# Altium PCB PCB1_BioTron.PcbDoc
Units mm, origin at the board's own origin, x right, y up, seen from the top; angles counter-clockwise.
Board outline 35.56 x 47.37 mm, 18 copper layers (F.Cu, F.Mask, B.Cu, B.Mask, F.SilkS, B.SilkS, F.Adhes, B.Adhes, F.Paste, B.Paste, Dwgs.User, Cmts.User, Eco1.User, Eco2.User, Edge.Cuts, Margin, B.CrtYd, F.CrtYd); 19 components, 26 nets, 65 pads, 15 vias.
Unrouted connection lines stored in the file: 11.
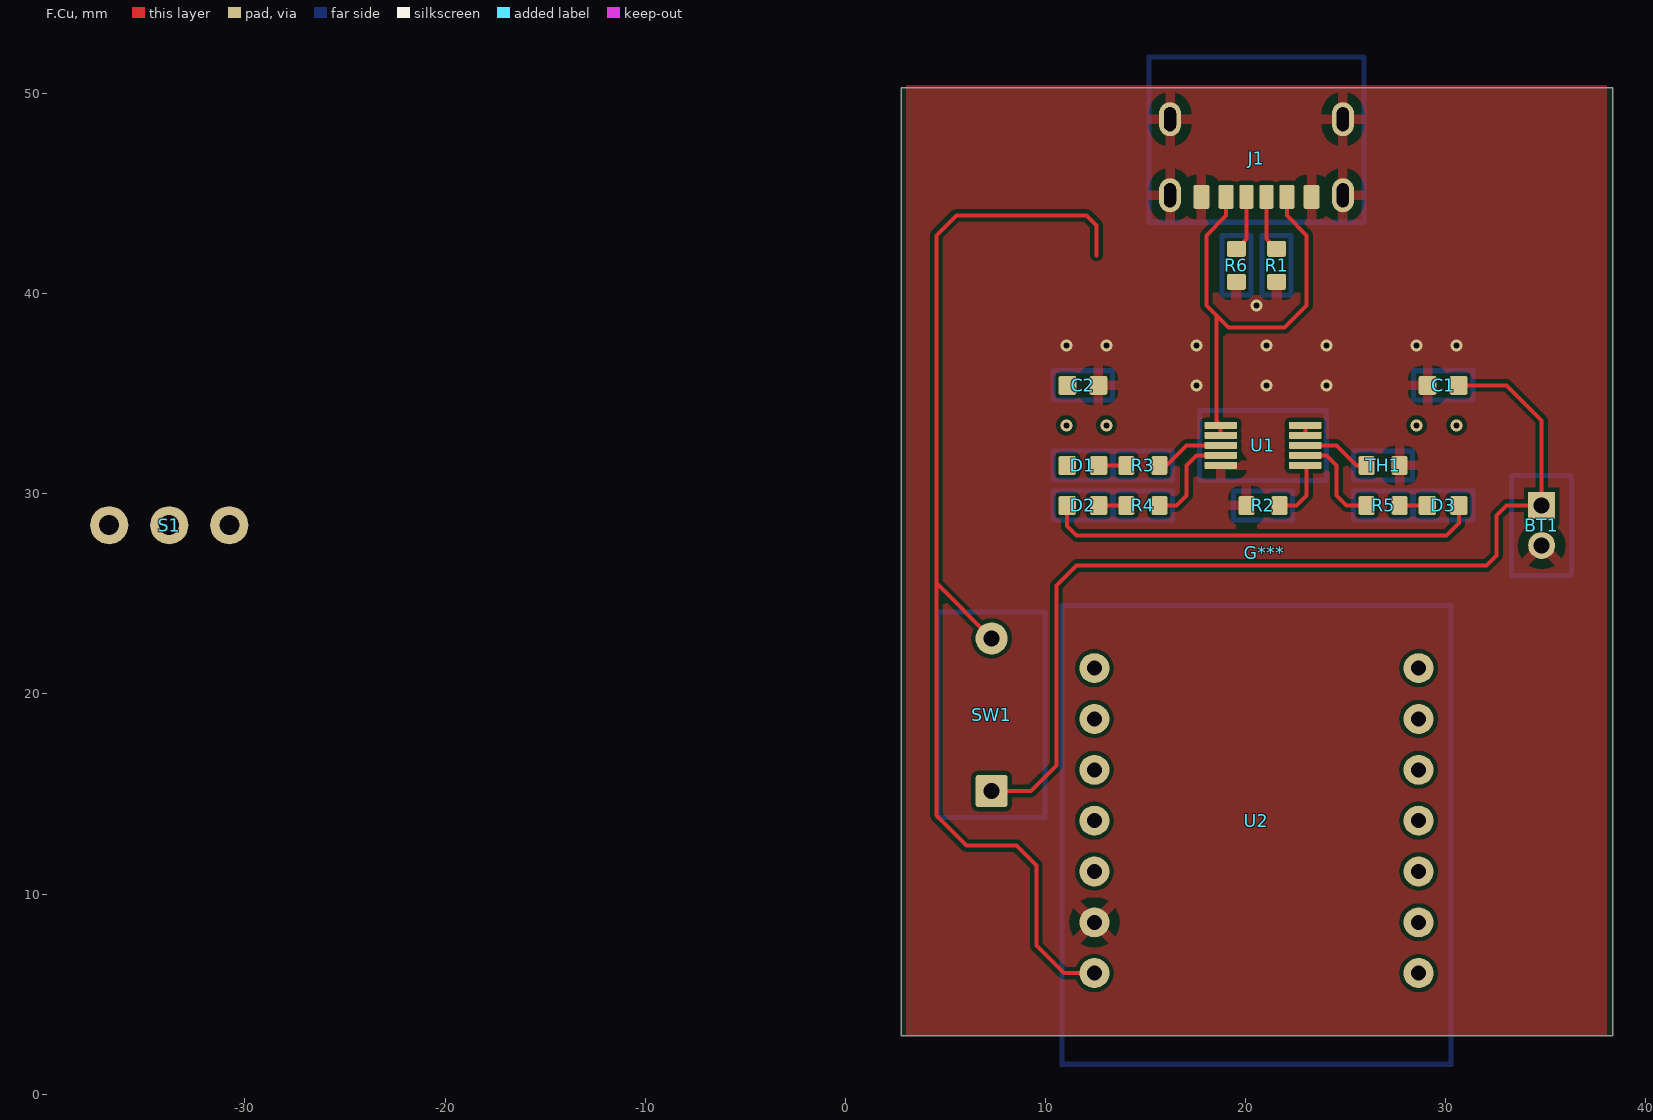
[diagram p0: F.Cu view]
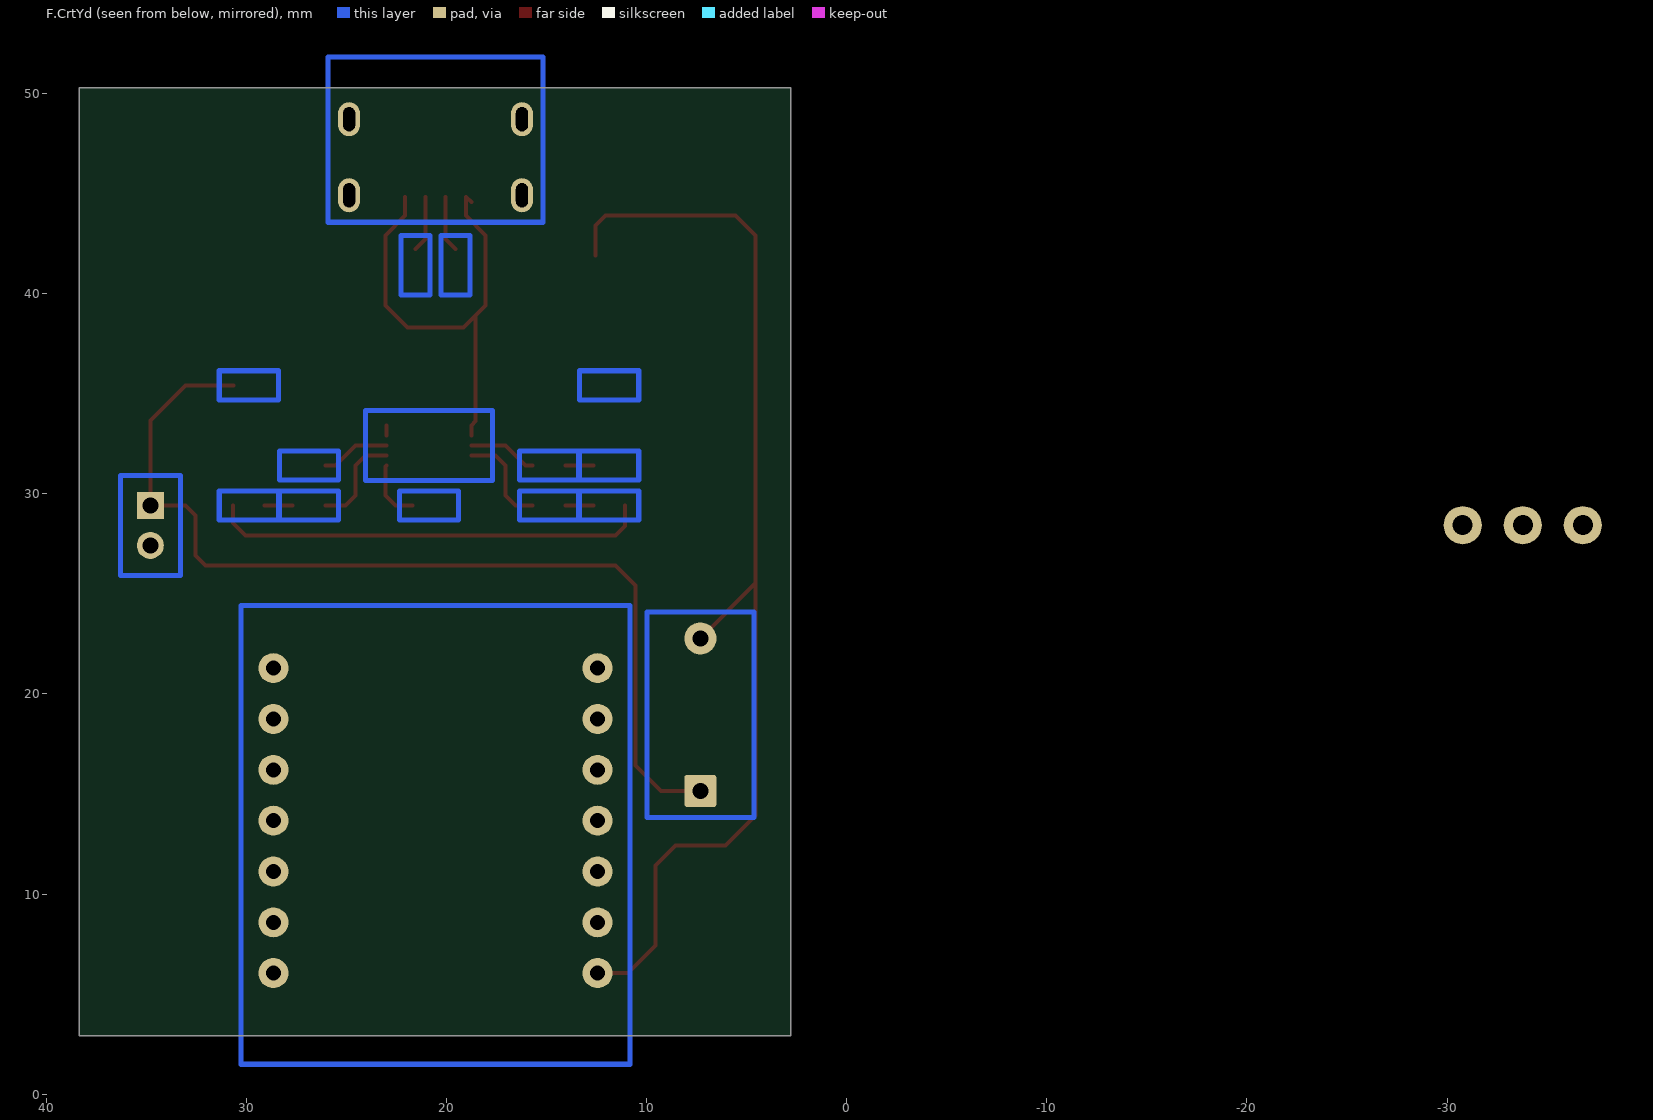
[diagram p1: F.CrtYd view, seen from below]
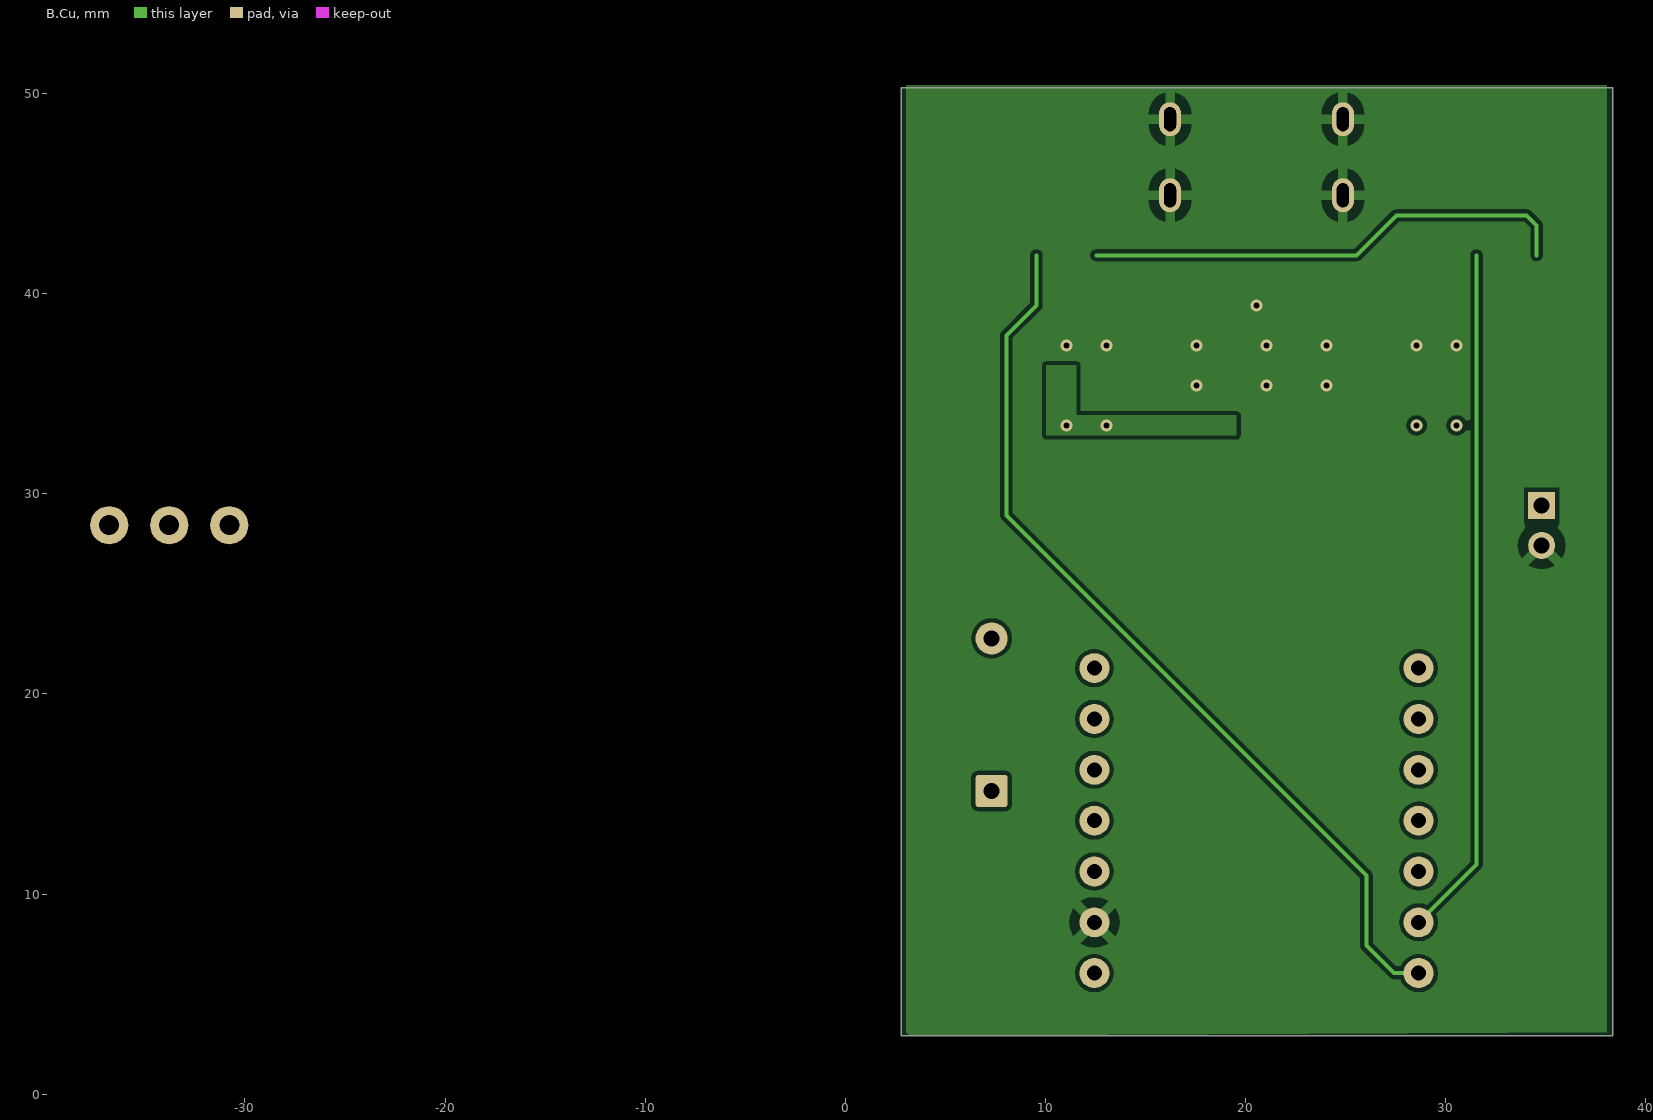
[diagram p2: B.Cu]
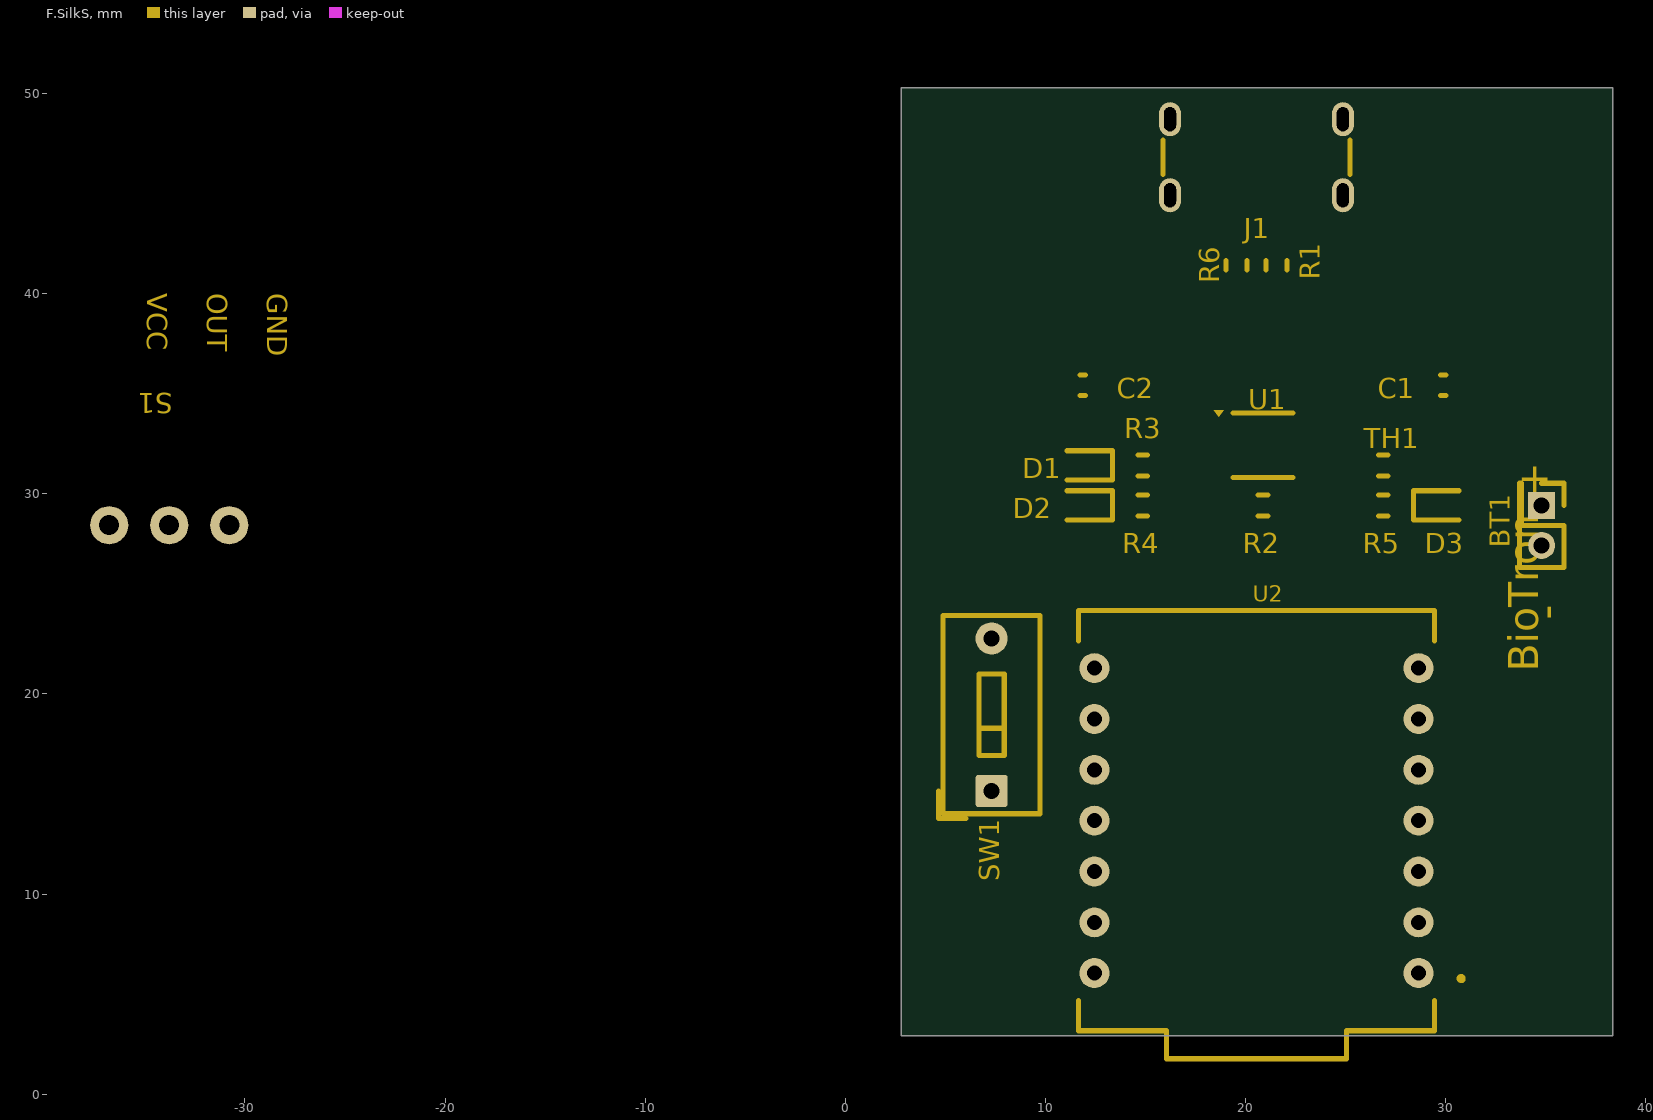
[diagram p3: F.SilkS]
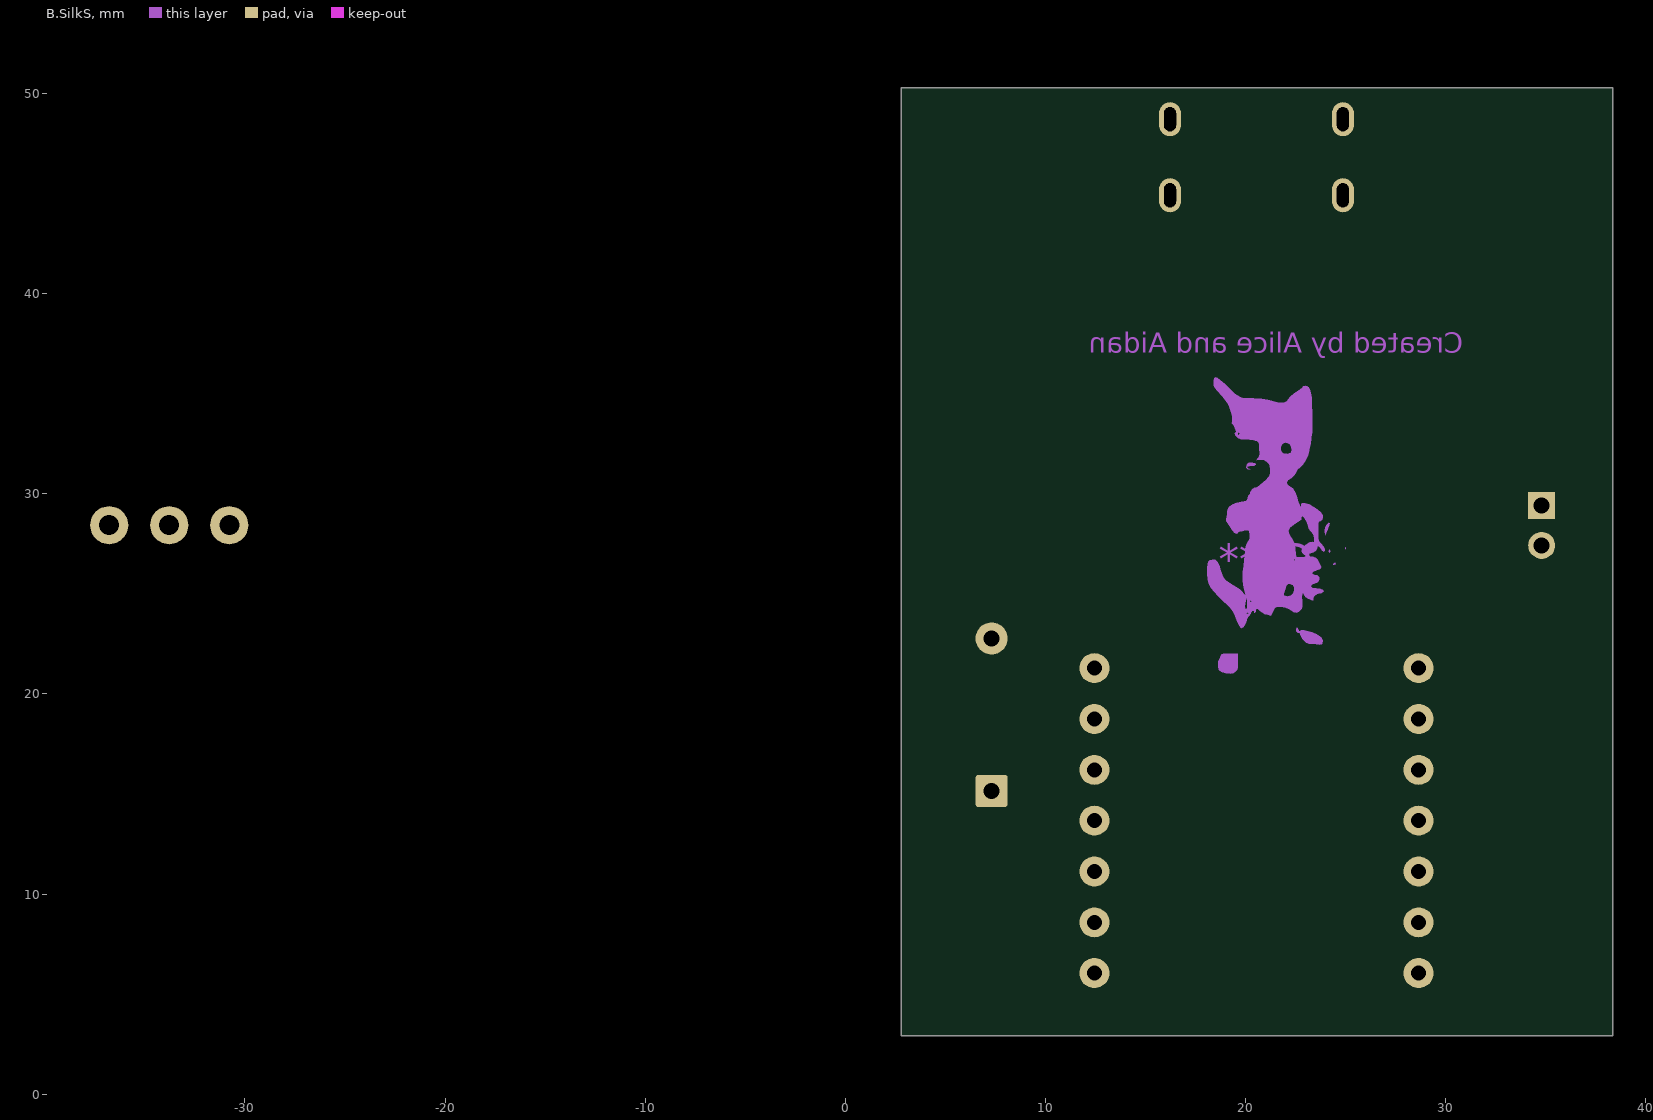
[diagram p4: B.SilkS]
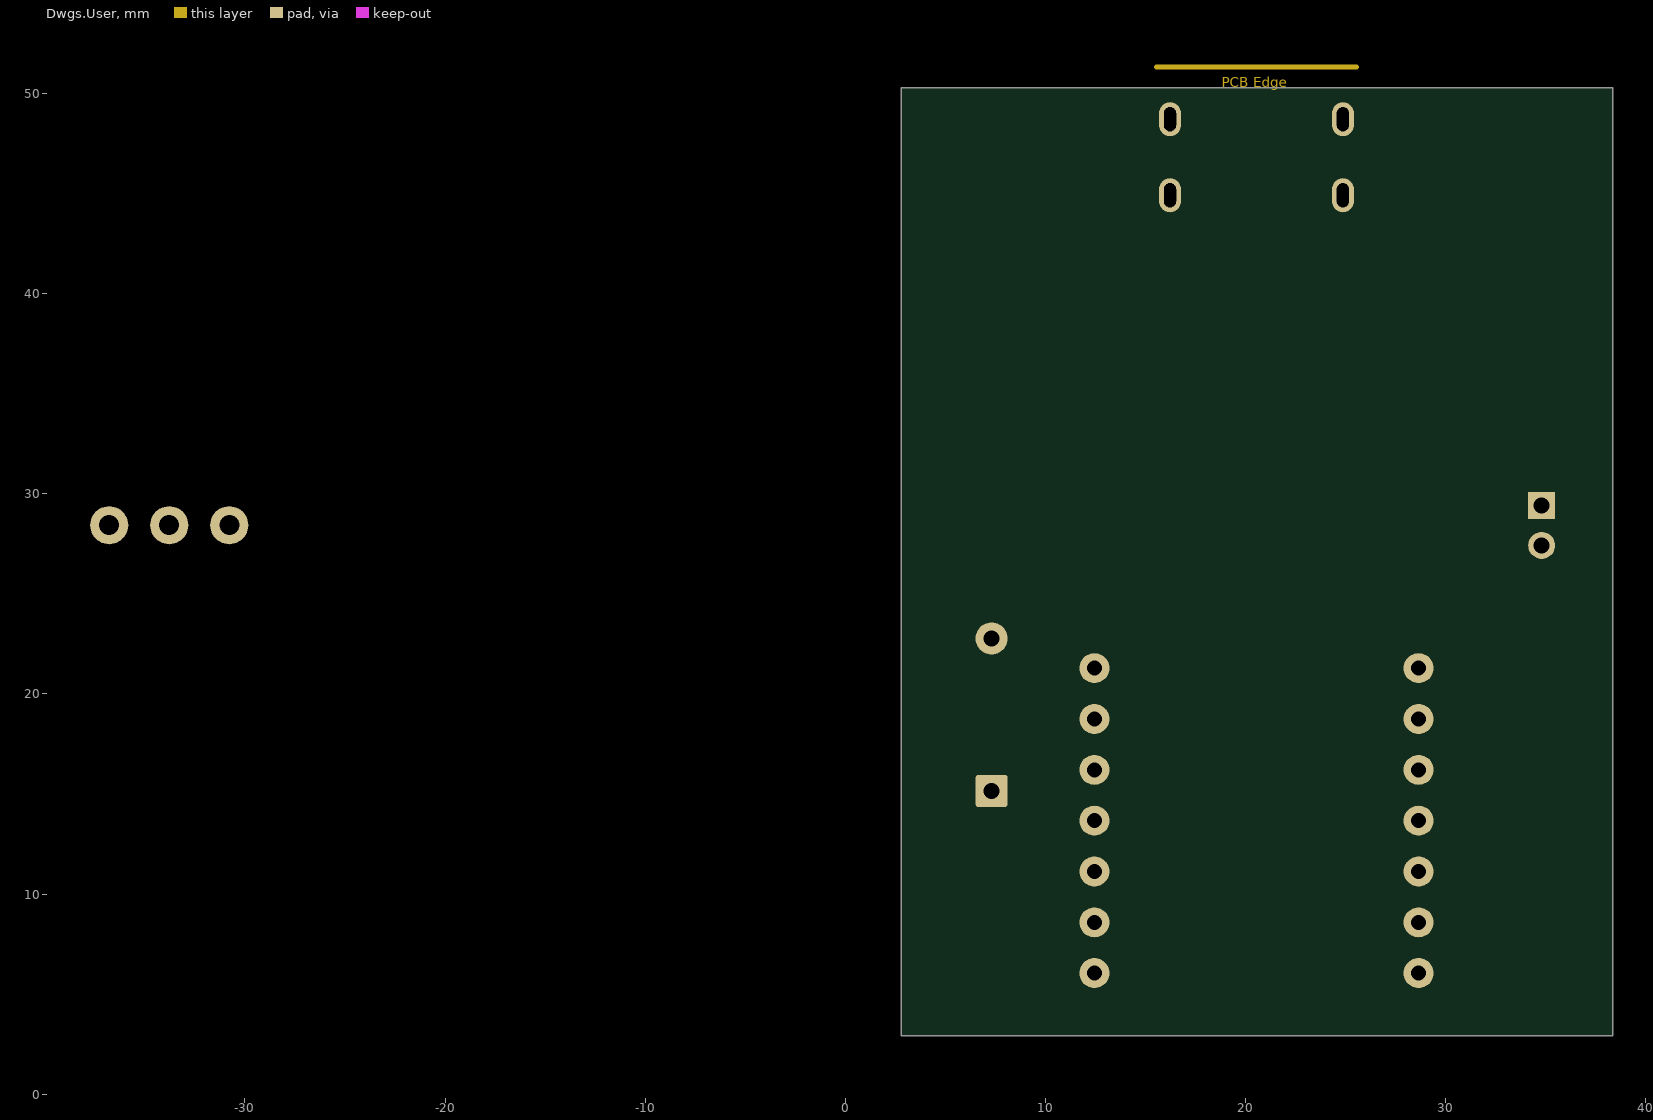
[diagram p5: Dwgs.User]
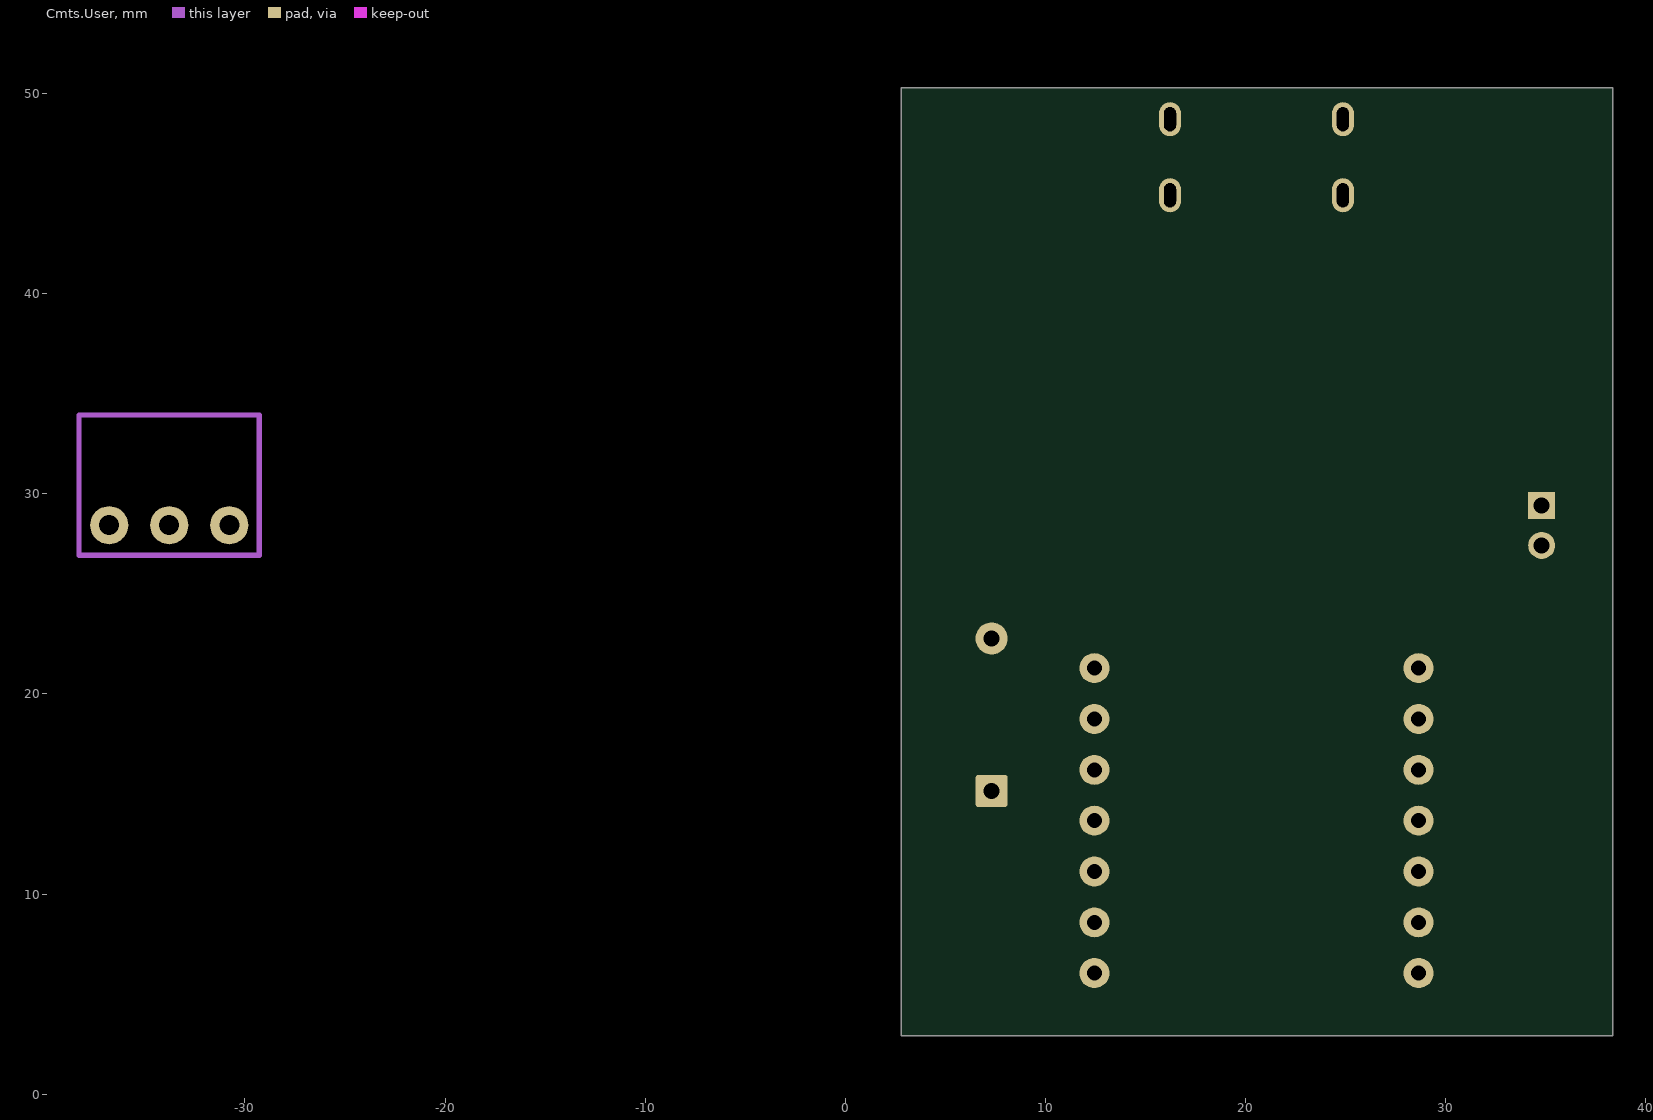
[diagram p6: Cmts.User]
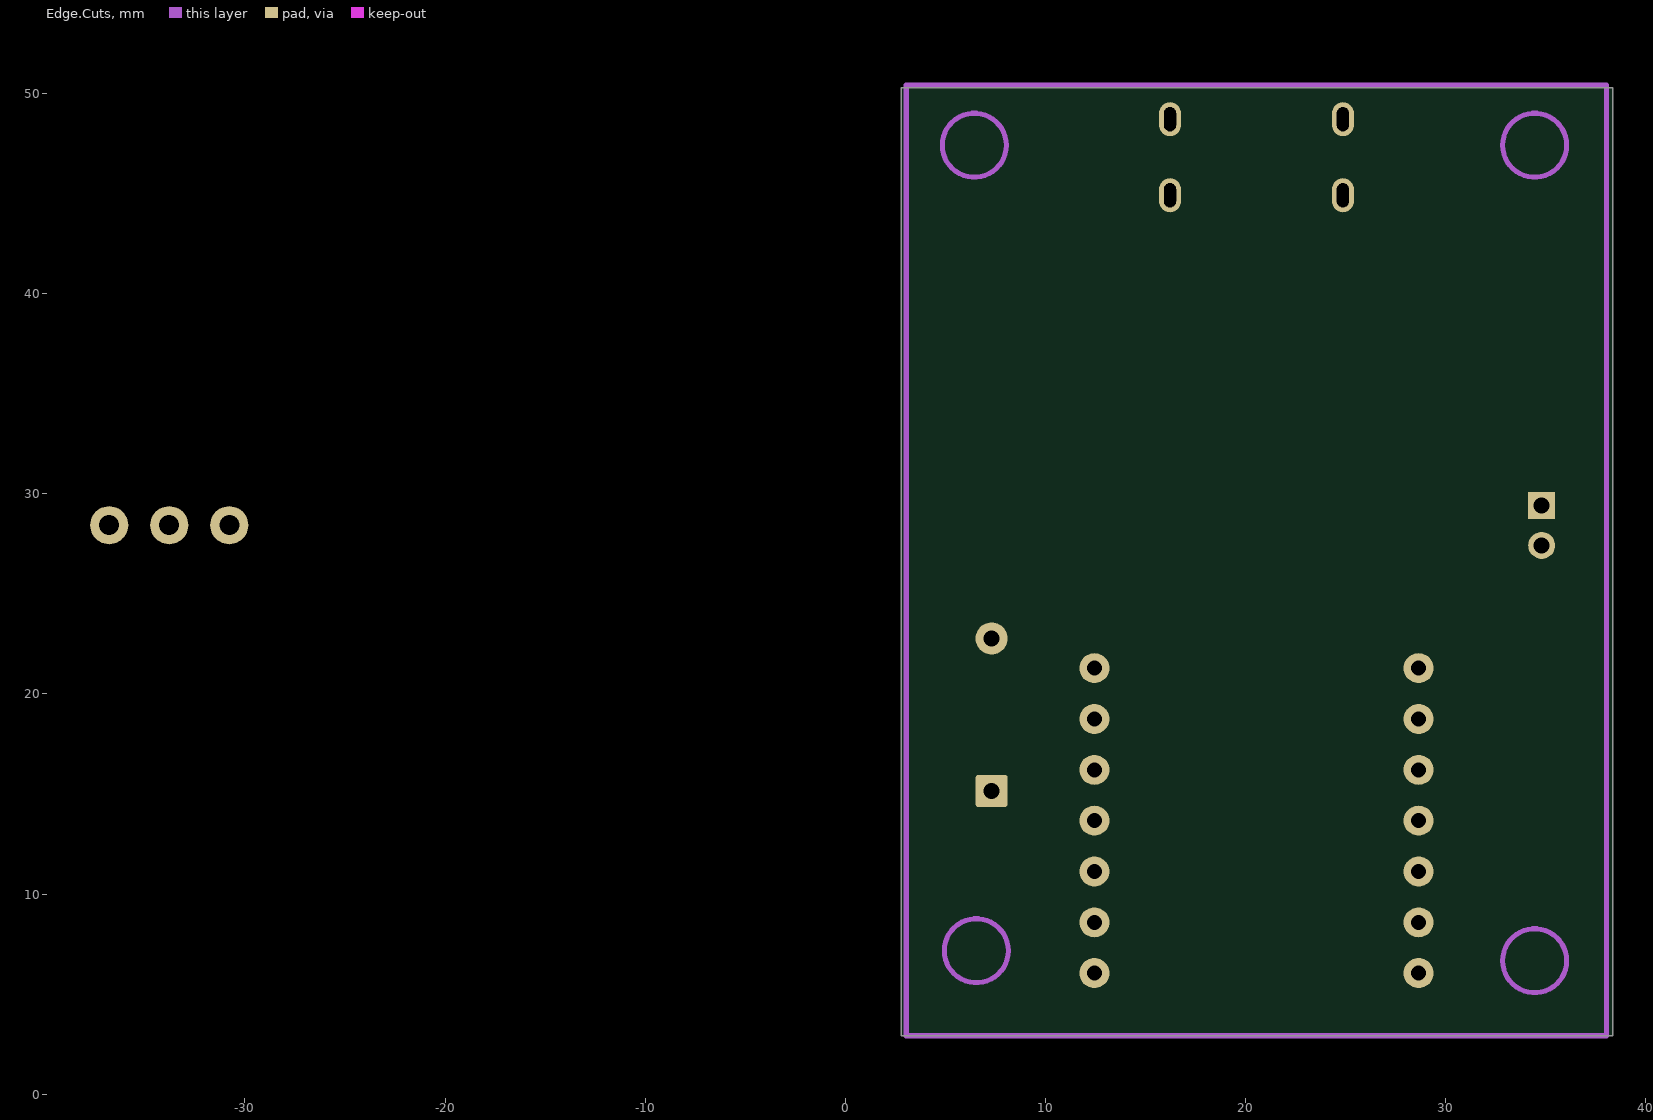
[diagram p7: Edge.Cuts]

## Layer stack, top to bottom
Top Solder: solder mask 0.0102, Solder Resist, Dk 3.5
F.Cu: signal copper 0.0356
Dielectric 1: dielectric 0.32, FR-4, Dk 4.8
F.Mask: signal copper 0.0356
Dielectric2: dielectric 0.32, FR-4, Dk 4.8
B.Cu: signal copper 0.0356
Dielectric3: dielectric 0.32, FR-4, Dk 4.8
B.Mask: signal copper 0.0356
Dielectric4: dielectric 0.32, FR-4, Dk 4.8
F.SilkS: signal copper 0.0356
Dielectric5: dielectric 0.32, FR-4, Dk 4.8
B.SilkS: signal copper 0.0356
Dielectric6: dielectric 0.32, FR-4, Dk 4.8
F.Adhes: signal copper 0.0356
Dielectric7: dielectric 0.32, FR-4, Dk 4.8
B.Adhes: signal copper 0.0356
Dielectric8: dielectric 0.32, FR-4, Dk 4.8
F.Paste: signal copper 0.0356
Dielectric9: dielectric 0.32, FR-4, Dk 4.8
B.Paste: signal copper 0.0356
Dielectric10: dielectric 0.32, FR-4, Dk 4.8
Dwgs.User: signal copper 0.0356
Dielectric11: dielectric 0.32, FR-4, Dk 4.8
Cmts.User: signal copper 0.0356
Dielectric12: dielectric 0.32, FR-4, Dk 4.8
Eco1.User: signal copper 0.0356
Dielectric13: dielectric 0.32, FR-4, Dk 4.8
Eco2.User: signal copper 0.0356
Dielectric14: dielectric 0.32, FR-4, Dk 4.8
Edge.Cuts: signal copper 0.0356
Dielectric15: dielectric 0.32, FR-4, Dk 4.8
Margin: signal copper 0.0356
Dielectric16: dielectric 0.32, FR-4, Dk 4.8
B.CrtYd: signal copper 0.0356
Dielectric17: dielectric 0.32, FR-4, Dk 4.8
F.CrtYd: signal copper 0.0356
Bottom Solder: solder mask 0.0102, Solder Resist, Dk 3.5

## Board outline
2.794,2.921 38.354,2.921 38.354,50.292 2.794,50.292

## Design rules (kind name [scope] priority, off if disabled: settings)
Clearance "Clearence 0.2_Polygon" [InNamedPolygon('F.Cu-GND') OR InNamedPolygon('F.Cu-Net-(BT1-+)') OR InNamedPolygon('F.Cu-Vin_5V2') OR InNamedPolygon('B.Cu-Vin_5V2') OR InNamedPolygon('B.Cu-GND') OR InNamedPolygon('B.Cu-Net-(BT1-+)')] p1: gap=0.2 ignorepadtopadclearanceinfootprint=FALSE
Clearance "Clearence 0.2_NetClass" [InNetClass('Default')] p2: gap=0.2 ignorepadtopadclearanceinfootprint=FALSE
MinimumSolderMaskSliver [All] p1: minsoldermaskwidth=0
PolygonConnect Polygon_B.Cu-Net-(BT1-+)_ConnectDirect [IsNamedPolygon('B.Cu-Net-(BT1-+)') vs IsVia] p1: connectstyle=Direct reliefconductorwidth=0.254 reliefentries=4 polygonreliefangle="90 Angle" airgapwidth=0.254
PolygonConnect Polygon_B.Cu-Net-(BT1-+)_ConnectRelief45 [IsNamedPolygon('B.Cu-Net-(BT1-+)') vs (IsThruPin or IsSMTPin) and (PadShape_AllLayers = 'Round')] p2: connectstyle=Relief reliefconductorwidth=0.5 reliefentries=4 polygonreliefangle="45 Angle" airgapwidth=0.5
PolygonConnect Polygon_B.Cu-Net-(BT1-+)_ConnectRelief90 [IsNamedPolygon('B.Cu-Net-(BT1-+)') vs (IsThruPin or IsSMTPin) and (PadShape_AllLayers <> 'Round')] p3: connectstyle=Relief reliefconductorwidth=0.5 reliefentries=4 polygonreliefangle="90 Angle" airgapwidth=0.5
PolygonConnect Polygon_B.Cu-GND_ConnectDirect [IsNamedPolygon('B.Cu-GND') vs IsVia] p4: connectstyle=Direct reliefconductorwidth=0.254 reliefentries=4 polygonreliefangle="90 Angle" airgapwidth=0.254
PolygonConnect Polygon_B.Cu-GND_ConnectRelief45 [IsNamedPolygon('B.Cu-GND') vs (IsThruPin or IsSMTPin) and (PadShape_AllLayers = 'Round')] p5: connectstyle=Relief reliefconductorwidth=0.5 reliefentries=4 polygonreliefangle="45 Angle" airgapwidth=0.5
PolygonConnect Polygon_B.Cu-GND_ConnectRelief90 [IsNamedPolygon('B.Cu-GND') vs (IsThruPin or IsSMTPin) and (PadShape_AllLayers <> 'Round')] p6: connectstyle=Relief reliefconductorwidth=0.5 reliefentries=4 polygonreliefangle="90 Angle" airgapwidth=0.5
PolygonConnect Polygon_B.Cu-Vin_5V2_ConnectDirect [IsNamedPolygon('B.Cu-Vin_5V2') vs IsVia] p7: connectstyle=Direct reliefconductorwidth=0.254 reliefentries=4 polygonreliefangle="90 Angle" airgapwidth=0.254
PolygonConnect Polygon_B.Cu-Vin_5V2_ConnectRelief45 [IsNamedPolygon('B.Cu-Vin_5V2') vs (IsThruPin or IsSMTPin) and (PadShape_AllLayers = 'Round')] p8: connectstyle=Relief reliefconductorwidth=0.5 reliefentries=4 polygonreliefangle="45 Angle" airgapwidth=0.5
PolygonConnect Polygon_B.Cu-Vin_5V2_ConnectRelief90 [IsNamedPolygon('B.Cu-Vin_5V2') vs (IsThruPin or IsSMTPin) and (PadShape_AllLayers <> 'Round')] p9: connectstyle=Relief reliefconductorwidth=0.5 reliefentries=4 polygonreliefangle="90 Angle" airgapwidth=0.5
PolygonConnect Polygon_F.Cu-Vin_5V2_ConnectDirect [IsNamedPolygon('F.Cu-Vin_5V2') vs IsVia] p10: connectstyle=Direct reliefconductorwidth=0.254 reliefentries=4 polygonreliefangle="90 Angle" airgapwidth=0.254
PolygonConnect Polygon_F.Cu-Vin_5V2_ConnectRelief45 [IsNamedPolygon('F.Cu-Vin_5V2') vs (IsThruPin or IsSMTPin) and (PadShape_AllLayers = 'Round')] p11: connectstyle=Relief reliefconductorwidth=0.5 reliefentries=4 polygonreliefangle="45 Angle" airgapwidth=0.5
PolygonConnect Polygon_F.Cu-Vin_5V2_ConnectRelief90 [IsNamedPolygon('F.Cu-Vin_5V2') vs (IsThruPin or IsSMTPin) and (PadShape_AllLayers <> 'Round')] p12: connectstyle=Relief reliefconductorwidth=0.5 reliefentries=4 polygonreliefangle="90 Angle" airgapwidth=0.5
PolygonConnect Polygon_F.Cu-Net-(BT1-+)_ConnectDirect [IsNamedPolygon('F.Cu-Net-(BT1-+)') vs IsVia] p13: connectstyle=Direct reliefconductorwidth=0.254 reliefentries=4 polygonreliefangle="90 Angle" airgapwidth=0.254
PolygonConnect Polygon_F.Cu-Net-(BT1-+)_ConnectRelief45 [IsNamedPolygon('F.Cu-Net-(BT1-+)') vs (IsThruPin or IsSMTPin) and (PadShape_AllLayers = 'Round')] p14: connectstyle=Relief reliefconductorwidth=0.5 reliefentries=4 polygonreliefangle="45 Angle" airgapwidth=0.5
PolygonConnect Polygon_F.Cu-Net-(BT1-+)_ConnectRelief90 [IsNamedPolygon('F.Cu-Net-(BT1-+)') vs (IsThruPin or IsSMTPin) and (PadShape_AllLayers <> 'Round')] p15: connectstyle=Relief reliefconductorwidth=0.5 reliefentries=4 polygonreliefangle="90 Angle" airgapwidth=0.5
PolygonConnect Polygon_F.Cu-GND_ConnectDirect [IsNamedPolygon('F.Cu-GND') vs IsVia] p16: connectstyle=Direct reliefconductorwidth=0.254 reliefentries=4 polygonreliefangle="90 Angle" airgapwidth=0.254
PolygonConnect Polygon_F.Cu-GND_ConnectRelief45 [IsNamedPolygon('F.Cu-GND') vs (IsThruPin or IsSMTPin) and (PadShape_AllLayers = 'Round')] p17: connectstyle=Relief reliefconductorwidth=0.5 reliefentries=4 polygonreliefangle="45 Angle" airgapwidth=0.5
PolygonConnect Polygon_F.Cu-GND_ConnectRelief90 [IsNamedPolygon('F.Cu-GND') vs (IsThruPin or IsSMTPin) and (PadShape_AllLayers <> 'Round')] p18: connectstyle=Relief reliefconductorwidth=0.5 reliefentries=4 polygonreliefangle="90 Angle" airgapwidth=0.5
RoutingVias [All] p1: holewidth=0.711 width=1.27 viastyle="Through Hole" minholewidth=0.711 minwidth=1.27 maxholewidth=0.711 maxwidth=1.27
SilkToSilkClearance [All] p1: silktosilkclearance=0
SilkToSolderMaskClearance [IsPad] p1: minsilkscreentomaskgap=0 clearancetoexposedcopper=TRUE
SolderMaskExpansion [All] p1: expansion=0.102 istentingtop=FALSE
Width [All] p1: maxlimit=10 minlimit=0.254 preferedwidth=0.254 toplayer_prefwidth=0.2 midlayer1_maxwidth=0.254 midlayer2_prefwidth=0.2 midlayer3_maxwidth=0.254 midlayer5_prefwidth=0.2 midlayer7_prefwidth=0.2 midlayer9_maxwidth=0.254 midlayer11_maxwidth=0.254 midlayer13_maxwidth=0.254 midlayer15_maxwidth=0.254 midlayer17_prefwidth=0.2 midlayer19_maxwidth=0.254 midlayer21_maxwidth=0.254 midlayer23_maxwidth=0.254 midlayer25_prefwidth=0.2 midlayer27_maxwidth=0.254 midlayer29_maxwidth=0.254 bottomlayer_prefwidth=0.2 minimp=50.000000 maximp=50.000000 favimp=50.000000
27 further rules are at their usual default settings.

## Classes and differential pairs
net class Default: GND Net-(BT1-+) Net-(D1-K) Net-(D2-K) Net-(D3-K) Net-(J1-CC1) Net-(J1-CC2) Net-(S1-OUT) Net-(S1-VCC) Net-(S2-OUT) Net-(U1-PROG) Net-(U1-STAT1) Net-(U1-STAT2) Net-(U1-THERM) Net-(U1-{\P\G\}\)\ unconnected-(U2-3V3-Pad12) unconnected-(U2-D7{slash}CSB{slash}P1{slash}RX-Pad8) unconnected-(U2-D8{slash}SCK{slash}P2-Pad9) unconnected-(U2-D9{slash}MISO{slash}P4-Pad10) unconnected-(U2-D10{slash}MOSI{slash}P3-Pad11) unconnected-(U2-P0{slash}{slash}TX{slash}D6-Pad7) unconnected-(U2-P6{slash}SDA{slash}D4-Pad5) unconnected-(U2-P7{slash}SCL{slash}D5-Pad6) unconnected-(U2-P28{slash}A2{slash}D2-Pad3) unconnected-(U2-P29{slash}A3{slash}D3-Pad4) Vin_5V2

## Components (designator, comment, footprint, x,y, rotation, side; value= is the part's Value field where it differs from the comment)
BT1 "Comment" PinHeader_2x01_P2.00mm_Vertical 34.798,29.421 r270 top value=Battery
C1 "Comment" C_0603_1608Metric 29.873,35.421 r180 top value="1 uF"
C2 "Comment" C_0603_1608Metric 11.873,35.421 r0 top value="1 uF"
D1 "Comment" LED_0603_1608Metric 11.873,31.421 r180 top value=LED
D2 "Comment" LED_0603_1608Metric 11.873,29.421 r180 top value=LED
D3 "Comment" LED_0603_1608Metric 29.873,29.421 r0 top value=LED
G*** "Comment" LOGO 20.96,27.058 r180 top value=LOGO
J1 "Comment" USB_C_Receptacle_GCT_USB4125-xx-x_6P_TopMnt_Horizontal 20.548,47.921 r180 top value=USB_C_Receptacle_PowerOnly_6P
R1 "Comment" R_0603_1608Metric 21.548,41.421 r270 top value="5k1 R"
R2 "Comment" R_0603_1608Metric 20.873,29.421 r0 top value=R
R3 "Comment" R_0603_1608Metric 14.873,31.421 r0 top value="470 R"
R4 "Comment" R_0603_1608Metric 14.873,29.421 r0 top value="470 R"
R5 "Comment" R_0603_1608Metric 26.873,29.421 r180 top value="470 R"
R6 "Comment" R_0603_1608Metric 19.548,41.421 r270 top value="5k1 R"
S1 "Comment" MYOWARE2 -33.782,28.434 r90 top value=~
SW1 "Comment" SW_DIP_SPSTx01_Slide_9.78x4.72mm_W7.62mm_P2.54mm 7.31,15.154 r90 top value=SW_SPST
TH1 "Comment" R_0603_1608Metric 26.873,31.421 r0 top value="10k R"
U1 "Comment" MSOP-10_3x3mm_P0.5mm 20.873,32.421 r0 top value=MCP73833-xxx-UN
U2 "Comment" MODULE_102010428 20.548,13.671 r180 top value=102010428

## Footprints (in the part's own frame and the unit in brackets; to place one, negate y for a bottom-side part, rotate by r counter-clockwise, add the part's x,y. Pads: shape width x height; smd on the part's side, far side on the other; paste and mask are expansions set on the pad)
C_0603_1608Metric [mm]
  rrect25% 0.9x0.95 smd paste-0.95 mask-0.95: 1(-0.775,0) 2(0.775,0)
  F.SilkS lines w0.254: 0.141,0.51 -0.141,0.51 ; 0.141,-0.51 -0.141,-0.51
  F.CrtYd lines w0.254: 1.48,0.73 1.48,-0.73 -1.48,-0.73 -1.48,0.73 1.48,0.73
LED_0603_1608Metric [mm]
  rrect25% 0.875x0.95 smd paste-0.95 mask-0.95: 1(-0.787,0) 2(0.787,0)
  F.SilkS lines w0.254: 0.8,0.735 -1.485,0.735 -1.485,-0.735 0.8,-0.735
  F.CrtYd lines w0.254: 1.48,0.73 1.48,-0.73 -1.48,-0.73 -1.48,0.73 1.48,0.73
LOGO [mm]
  B.SilkS region: -4.014,-0.193 -4.02,-0.259 -4.037,-0.268 -4.057,-0.222 -4.053,-0.193 -4.02,-0.185
  B.SilkS region: -3.198,-0.052 -3.191,-0.072 -3.223,-0.138 -3.252,-0.144 -3.279,-0.087 -3.278,-0.059 -3.252,-0.002
  B.SilkS region: -3.431,0.603 -3.418,0.556 -3.43,0.541 -3.505,0.5 -3.517,0.502 -3.557,0.556 -3.547,0.582 -3.47,0.611
  B.SilkS region: -3.011,-1.084 -3.01,-1.098 -3.025,-1.278 -3.107,-1.409 -3.205,-1.489 -3.246,-1.477 -3.229,-1.37 -3.154,-1.168 -3.029,-0.872
  B.SilkS region: 0.851,-4.179 0.918,-4.241 0.908,-4.381 0.884,-4.44 0.81,-4.489 0.66,-4.502 0.607,-4.501 0.482,-4.477 0.445,-4.419 0.449,-4.395 0.512,-4.349 0.667,-4.335 0.784,-4.326 0.875,-4.294 0.882,-4.249 0.792,-4.207 0.77,-4.201 0.726,-4.183 0.789,-4.175
  B.SilkS region: 1.862,6.032 1.954,6.016 2.125,5.966 2.237,5.907 2.287,5.839 2.328,5.664 2.31,5.448 2.233,5.225 2.19,5.139 2.146,5.082 2.079,5.05 1.968,5.037 1.79,5.039 1.523,5.05 1.351,5.058 1.34,5.426 1.337,5.576 1.348,5.733 1.385,5.839 1.456,5.931 1.491,5.967 1.578,6.03 1.687,6.048
  B.SilkS region: -2.707,4.581 -2.567,4.564 -2.388,4.558 -2.372,4.558 -2.196,4.544 -2.073,4.491 -1.948,4.377 -1.906,4.328 -1.815,4.197 -1.779,4.099 -1.766,4.047 -1.698,4.002 -1.644,3.992 -1.574,3.917 -1.585,3.791 -1.602,3.754 -1.634,3.745 -1.676,3.834 -1.723,3.916 -1.768,3.908 -1.827,3.878 -1.97,3.878 -2.165,3.915 -2.384,3.982 -2.601,4.074 -2.634,4.09 -2.814,4.221 -2.89,4.367 -2.866,4.54 -2.838,4.58 -2.746,4.591
  B.SilkS region: 397 vertices and 7 holes, not listed, extent -3,-8.774 2.881,3.779
MODULE_102010428 [mm]
  round 1.5 hole 0.75 paste-2539.97 mask-1.5: 1(-8.1,7.62) 2(-8.1,5.08) 3(-8.1,2.54) 4(-8.1,0) 5(-8.1,-2.54) 6(-8.1,-5.08) 7(-8.1,-7.62) 8(8.1,-7.62) 9(8.1,-5.08) 10(8.1,-2.54) 11(8.1,0) 12(8.1,2.54) 13(8.1,5.08) 14(8.1,7.62)
  F.SilkS circle w0.254: c-10.229,7.891 r0.1
  F.SilkS lines w0.254: 8.9,9 8.9,10.5 4.5,10.5 4.5,11.9 -4.5,11.9 -4.5,10.5 -8.9,10.5 -8.9,9 ; 8.9,-8.97 8.9,-10.5 -8.9,-10.5 -8.9,-8.97
  F.CrtYd lines w0.254: 9.725,12.174 9.725,-10.75 -9.725,-10.75 -9.725,12.174 9.725,12.174
MSOP-10_3x3mm_P0.5mm [mm]
  rrect25% 1.625x0.35 smd paste-1.625 mask-1.625: 1(-2.113,1) 2(-2.113,0.5) 3(-2.113,0) 4(-2.113,-0.5) 5(-2.113,-1) 6(2.113,-1) 7(2.113,-0.5) 8(2.113,0) 9(2.113,0.5) 10(2.113,1)
  F.SilkS region: -2.213,1.435 -2.452,1.765 -1.973,1.765
  F.SilkS lines w0.254: -1.5,-1.61 0,-1.61 1.5,-1.61 ; -1.5,1.61 0,1.61 1.5,1.61
  F.CrtYd lines w0.254: -3.18,-1.75 -3.18,1.75 3.18,1.75 3.18,-1.75 -3.18,-1.75
MYOWARE2 [mm]
  round 1.905 hole 1: 1(0,3) 2(0,0) 3(0,-3)
  Cmts.User lines w0.254: -1.5,4.5 -1.5,-4.5 5.5,-4.5 5.5,4.5 -1.5,4.5
  body extent -19.5,-8.62 2.5,8.88, height 4.41
PinHeader_2x01_P2.00mm_Vertical [mm]
  rect 1.35x1.35 hole 0.8 paste-2539.97 mask-1.35: 1(0,0)
  round 1.35 hole 0.8 paste-2539.97 mask-1.35: 2(2,0)
  F.SilkS lines w0.254: -1.11,0 -1.11,1.11 0,1.11 ; 3.11,-1.11 -1.11,-1.11 -1.11,-1 1,-1 1,1.11 3.11,1.11 3.11,-1.11
  F.CrtYd lines w0.254: 3.5,-1.5 -1.5,-1.5 -1.5,1.5 3.5,1.5 3.5,-1.5
R_0603_1608Metric [mm]
  rrect25% 0.8x0.95 smd paste-0.95 mask-0.95: 1(-0.825,0) 2(0.825,0)
  F.SilkS lines w0.254: 0.237,-0.523 -0.237,-0.523 ; 0.237,0.523 -0.237,0.523
  F.CrtYd lines w0.254: 1.48,-0.73 -1.48,-0.73 -1.48,0.73 1.48,0.73 1.48,-0.73
SW_DIP_SPSTx01_Slide_9.78x4.72mm_W7.62mm_P2.54mm [mm]
  rrect16% 1.6x1.6 hole 0.8 paste-2539.97 mask-1.6: 1(0,0)
  round 1.6 hole 0.8 paste-2539.97 mask-1.6: 2(7.62,0)
  F.SilkS lines w0.254: 0.003,2.66 -1.38,2.66 -1.38,1.277 ; 1.78,0.635 1.78,-0.635 ; 1.78,0.635 5.84,0.635 5.84,-0.635 1.78,-0.635 ; 1.78,0.635 1.78,-0.635 ; 1.78,0.635 3.133,0.635 ; 3.133,0.635 3.133,-0.635 ; 3.133,0.635 3.133,-0.635 ; 1.78,-0.635 3.133,-0.635 ; -1.14,2.42 -1.14,-2.42 8.76,-2.42 8.76,2.42 -1.14,2.42
  F.CrtYd lines w0.254: -1.33,2.67 -1.33,-2.67 8.95,-2.67 8.95,2.67 -1.33,2.67
USB_C_Receptacle_GCT_USB4125-xx-x_6P_TopMnt_Horizontal [mm]
  rrect25% 0.7x1.2 smd paste-1.2 mask-1.2: A5(-0.5,3.08) B5(0.5,3.08)
  rrect25% 0.76x1.2 smd paste-1.2 mask-1.2: A9(1.52,3.08) B9(-1.52,3.08)
  rrect25% 0.8x1.2 smd paste-1.2 mask-1.2: A12(2.75,3.08) B12(-2.75,3.08)
  rrect100% 1.1x1.7 hole 1.2 slot 0.6 at 0 deg paste-2539.97 mask-1.7: S1(-4.32,3) S1(-4.32,-0.8) S1(4.32,3) S1(4.32,-0.8)
  F.SilkS lines w0.254: 4.67,1.95 4.67,0.25 ; -4.67,1.95 -4.67,0.25
  Dwgs.User lines w0.254: 5,-3.4 -5,-3.4
  F.CrtYd lines w0.254: 5.37,4.35 5.37,-3.9 -5.37,-3.9 -5.37,4.35 5.37,4.35

## Part data
BT1: library part PinHeader_2x01_P2.00mm_Vertical, "Through hole straight pin header, 2x01, 2.00mm pitch, double rows", Description="Multiple-cell battery"
C1 C2: library part C_0603_1608Metric, "Capacitor SMD 0603 (1608 Metric), square (rectangular) end terminal, IPC-7351 nominal, (Body size source: IPC-SM-782 page 76, https://www.pcb-3d.com/wordpress/wp-content/uploads/ipc-sm-782a_amendment_1_and_2.pdf), generated with kicad-footprint-generator", ki_fp_filters=C_*
D1 D2 D3: library part LED_0603_1608Metric, "LED SMD 0603 (1608 Metric), square (rectangular) end terminal, IPC-7351 nominal, (Body size source: http://www.tortai-tech.com/upload/download/2011102023233369053.pdf), generated with kicad-footprint-generator", Description="Light emitting diode", Sim.Pins="1=K 2=A", ki_fp_filters="LED* LED_SMD:* LED_THT:*"
G***: library part LOGO
J1: library part USB_C_Receptacle_GCT_USB4125-xx-x_6P_TopMnt_Horizontal, "USB Type C Receptacle, GCT, power-only, 6P, top mounted, horizontal, 3A, 1mm stake: https://gct.co/files/drawings/usb4125.pdf", Datasheet=https://www.usb.org/sites/default/files/documents/usb_type-c.zip, Description="USB Power-Only 6P Type-C Receptacle connector", ki_fp_filters=USB*C*Receptacle*
R1 R2 R3 R4 R5 R6 TH1: library part R_0603_1608Metric, "Resistor SMD 0603 (1608 Metric), square (rectangular) end terminal, IPC-7351 nominal, (Body size source: IPC-SM-782 page 72, https://www.pcb-3d.com/wordpress/wp-content/uploads/ipc-sm-782a_amendment_1_and_2.pdf), generated with kicad-footprint-generator", ki_fp_filters=R_*
  R1 R2 R3 R4 R5: Description=Resistor
S1: library part Myoware2
SW1: library part SW_DIP_SPSTx01_Slide_9.78x4.72mm_W7.62mm_P2.54mm, "1x-dip-switch SPST , Slide, row spacing 7.62 mm (300 mils), body size 9.78x4.72mm (see e.g. https://www.ctscorp.com/wp-content/uploads/206-208.pdf)", Description="Single Pole Single Throw (SPST) switch"
U1: library part MSOP-10_3x3mm_P0.5mm, "MSOP, 10 Pin (https://www.jedec.org/system/files/docs/mo-187F.pdf variant BA), generated with kicad-footprint-generator ipc_gullwing_generator.py", Datasheet=https://ww1.microchip.com/downloads/aemDocuments/documents/OTH/ProductDocuments/DataSheets/22005b.pdf, Description="Stand-Alone Linear Li-Ion / Li-Polymer Charge Management Controller, MSOP-10", ki_fp_filters=MSOP*3x3mm*P0.5mm*
U2: library part MODULE_102010428, MAXIMUM_PACKAGE_HEIGHT=N/A, Package=None, MANUFACTURER=Seeedstudio, MF="Seeed Technology Co., Ltd", Price=None, Check_prices=https://www.snapeda.com/parts/102010428/Seeed+Studio/view-part/?ref=eda, STANDARD="Manufacturer Recommendations", PARTREV=1.3, SnapEDA_Link=https://www.snapeda.com/parts/102010428/Seeed+Studio/view-part/?ref=snap, MP=102010428, Description_1="RP2040 XIAO RP2040 series ARM® Cortex®-M0+ MCU 32-Bit Embedded Evaluation Board", Availability="In Stock"

## Via types
v1: diameter 0.6, hole 0.3, F.Cu to B.Cu, tented both sides, 15 vias

## Nets (pads, with @x,y where several pads share a name; then routed paths per layer and width w, separated by ;. In a path a pad name is that pad's centre, name@x,y a point inside that pad or via, vN(x,y) a via of type N, cw(c..) or ccw(c..) an arc to the next point about the centre after c; other vN are vias at no path point)
GND: BT1.2 C1.2 C2.2 J1.A12 J1.B12 J1.S1 R1.2 R2.1 R6.2 S1.3 TH1.2 U1.5 U2.13
  other v1: 17.548,35.421 21.048,35.421 24.048,35.421 11.048,37.421 13.048,37.421 17.548,37.421 21.048,37.421 24.048,37.421 28.548,37.421 30.548,37.421 20.548,39.421
Net-(BT1-+): BT1.1 C1.1 SW1.1 U1.9 U1.10 | length 49.5
  F.Cu w0.2: SW1.1 9.28,15.154 10.548,16.421 10.548,25.421 11.548,26.421 32.048,26.421 32.548,26.921 32.548,28.921 33.048,29.421 BT1.1 34.798,33.671 33.048,35.421 C1.1 ; U1.9 U1.10
  other v1: 28.548,33.421 30.548,33.421
Net-(D1-K): D1.1 R3.1 | length 1.4
  F.Cu w0.2: D1.1 R3.1
Net-(D2-K): D2.1 R4.1 | length 1.4
  F.Cu w0.2: D2.1 R4.1
Net-(D3-K): D3.1 R5.1 | length 1.4
  F.Cu w0.2: R5.1 D3.1
Net-(J1-CC1): J1.A5 R1.1 | length 2.8
  F.Cu w0.2: J1.A5 21.048,42.746 R1.1
Net-(J1-CC2): J1.B5 R6.1 | length 2.8
  F.Cu w0.2: R6.1 20.048,42.746 J1.B5
Net-(S1-OUT): S1.2 U2.1 | length 45.7
  B.Cu w0.2: 9.548,41.921 9.548,39.421 8.048,37.921 8.048,28.921 26.048,10.921 26.048,7.421 27.418,6.051 U2.1
Net-(S1-VCC): S1.1 SW1.2 U2.14 | length 81.1
  F.Cu w0.2: SW1.2 4.548,25.536 ; U2.14 10.918,6.051 9.548,7.421 9.548,11.421 8.548,12.421 6.048,12.421 4.548,13.921 4.548,25.536 ; 12.548,41.921 12.548,43.421 12.048,43.921 5.548,43.921 4.548,42.921 4.548,25.536
  B.Cu w0.2: 12.548,41.921 25.548,41.921 27.548,43.921 34.048,43.921 34.548,43.421 34.548,41.921
Net-(S2-OUT): U2.2 | length 34.5
  B.Cu w0.2: U2.2 31.548,11.491 31.548,41.921
Net-(U1-PROG): R2.2 U1.6 | length 3.1
  F.Cu w0.2: R2.2 22.548,29.421 23.048,29.921 23.048,31.358 U1.6
Net-(U1-STAT1): R3.2 U1.3 | length 3.5
  F.Cu w0.2: R3.2 16.048,31.421 17.048,32.421 U1.3
Net-(U1-STAT2): R4.2 U1.4 | length 5
  F.Cu w0.2: R4.2 16.548,29.421 17.048,29.921 17.048,31.421 17.548,31.921 U1.4
Net-(U1-THERM): TH1.1 U1.8 | length 3.5
  F.Cu w0.2: U1.8 24.548,32.421 25.548,31.421 TH1.1
Net-(U1-{\P\G\}\)\: R5.2 U1.7 | length 5
  F.Cu w0.2: U1.7 24.048,31.921 24.548,31.421 24.548,29.921 25.048,29.421 R5.2
unconnected-(U2-3V3-Pad12): U2.12
unconnected-(U2-D7{slash}CSB{slash}P1{slash}RX-Pad8): U2.8
unconnected-(U2-D8{slash}SCK{slash}P2-Pad9): U2.9
unconnected-(U2-D9{slash}MISO{slash}P4-Pad10): U2.10
unconnected-(U2-D10{slash}MOSI{slash}P3-Pad11): U2.11
unconnected-(U2-P0{slash}{slash}TX{slash}D6-Pad7): U2.7
unconnected-(U2-P6{slash}SDA{slash}D4-Pad5): U2.5
unconnected-(U2-P7{slash}SCL{slash}D5-Pad6): U2.6
unconnected-(U2-P28{slash}A2{slash}D2-Pad3): U2.3
unconnected-(U2-P29{slash}A3{slash}D3-Pad4): U2.4
Vin_5V2: C2.1 D1.2 D2.2 D3.2 J1.A9 J1.B9 U1.1 U1.2 | length 46
  F.Cu w0.2: D2.2 11.085,28.384 11.548,27.921 30.048,27.921 30.661,28.534 D3.2 ; U1.2 U1.1 18.548,33.634 18.548,38.921 ; J1.A9@18.76,44.573 J1.A9 19.028,43.901 18.048,42.921 18.048,39.421 18.548,38.921 ; J1.B9 22.068,43.901 23.048,42.921 23.048,39.421 21.947,38.32 19.149,38.32 18.548,38.921
  other v1: 11.048,33.421 13.048,33.421
copper on no net: | length 205.2
  Edge.Cuts w0.254: 3.048,2.921 38.048,2.921 38.048,50.421 3.048,50.421 3.048,2.921 ; 8.048,47.421 ccw(c6.448,47.421) 8.048,47.421 ; 8.148,7.171 ccw(c6.548,7.171) 8.148,7.171 ; 36.048,6.671 ccw(c34.448,6.671) 36.048,6.671 ; 36.048,47.421 ccw(c34.448,47.421) 36.048,47.421

## Polygon pours and split planes (outlines as drawn)
Vin_5V2 on F.Cu "F.Cu-Vin_5V2" (solid, remove dead copper, pour order 8): 9.548,36.921 11.548,36.921 11.548,33.921 19.548,33.921 19.548,32.921 11.548,32.921 11.548,28.921 9.548,28.921
Net-(BT1-+) on F.Cu "F.Cu-Net-(BT1-+)" (solid, remove dead copper, pour order 7): 32.048,36.921 32.048,32.921 22.048,32.921 22.048,34.421 30.048,34.421 30.048,36.921
GND on F.Cu "F.Cu-GND" (solid, remove dead copper, pour order 5): 3.048,50.421 3.048,2.921 38.048,2.921 38.048,50.421
Net-(BT1-+) on B.Cu "B.Cu-Net-(BT1-+)" (solid, remove dead copper, pour order 10): 31.048,35.921 31.048,32.921 22.048,32.921 22.048,34.421 30.048,34.421 30.048,35.921
GND on B.Cu "B.Cu-GND" (solid, remove dead copper, pour order 9): 3.048,50.421 3.048,2.921 38.048,3.089 38.048,50.421
Vin_5V2 on B.Cu "B.Cu-Vin_5V2" (solid, remove dead copper, pour order 6): 10.048,36.421 10.048,32.921 19.548,32.921 19.548,33.921 11.548,33.921 11.548,36.421

## Other copper
F.SilkS:
  text "+" at 33.598,30.078 h1.5
  text "-" at 35.748,23.721 h1.5 r90
  text "BioTron" at 34.634,21.121 h1.5 r90
B.SilkS:
  text "Created by Alice and Aidan" at 30.873,37.056 h1

## Text inside footprints (layer, text, board x,y; h text height)
J1: Dwgs.User "PCB Edge" at 18.8,50.313 h0.5
S1: F.SilkS "OUT" at -31.882,40.034 h1 r270; F.SilkS "GND" at -28.882,40.034 h1 r270; F.SilkS "VCC" at -34.882,40.034 h1 r270
SW1: F.Fab "on" at 6.103,20.02 h0.6 r90